# Altium PCB NewBoat.PcbDoc
Units mm, origin at the board's own origin, x right, y up, seen from the top; angles counter-clockwise.
Board outline 74.04 x 99.57 mm, 2 copper layers (Top Layer, Bottom Layer); 37 components, 56 nets, 200 pads, 1 vias.
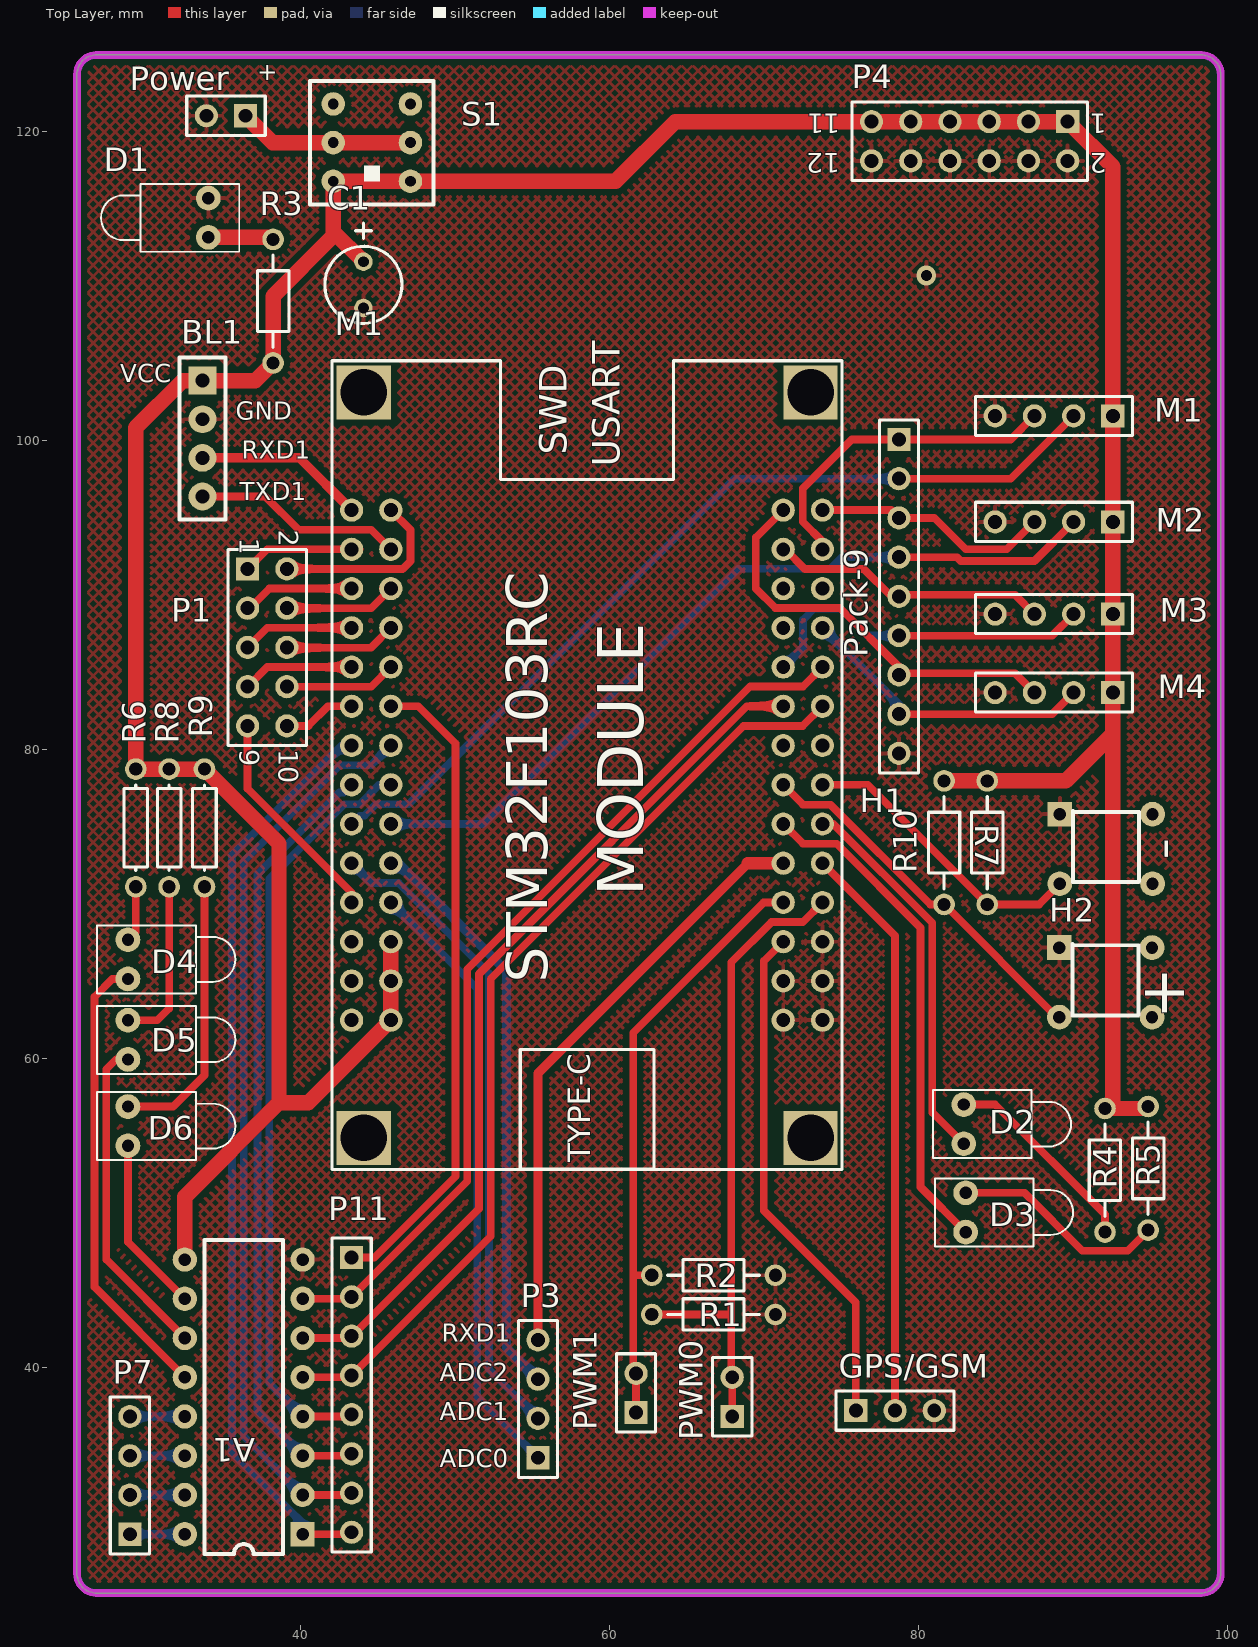
[diagram p0: Top Layer view]
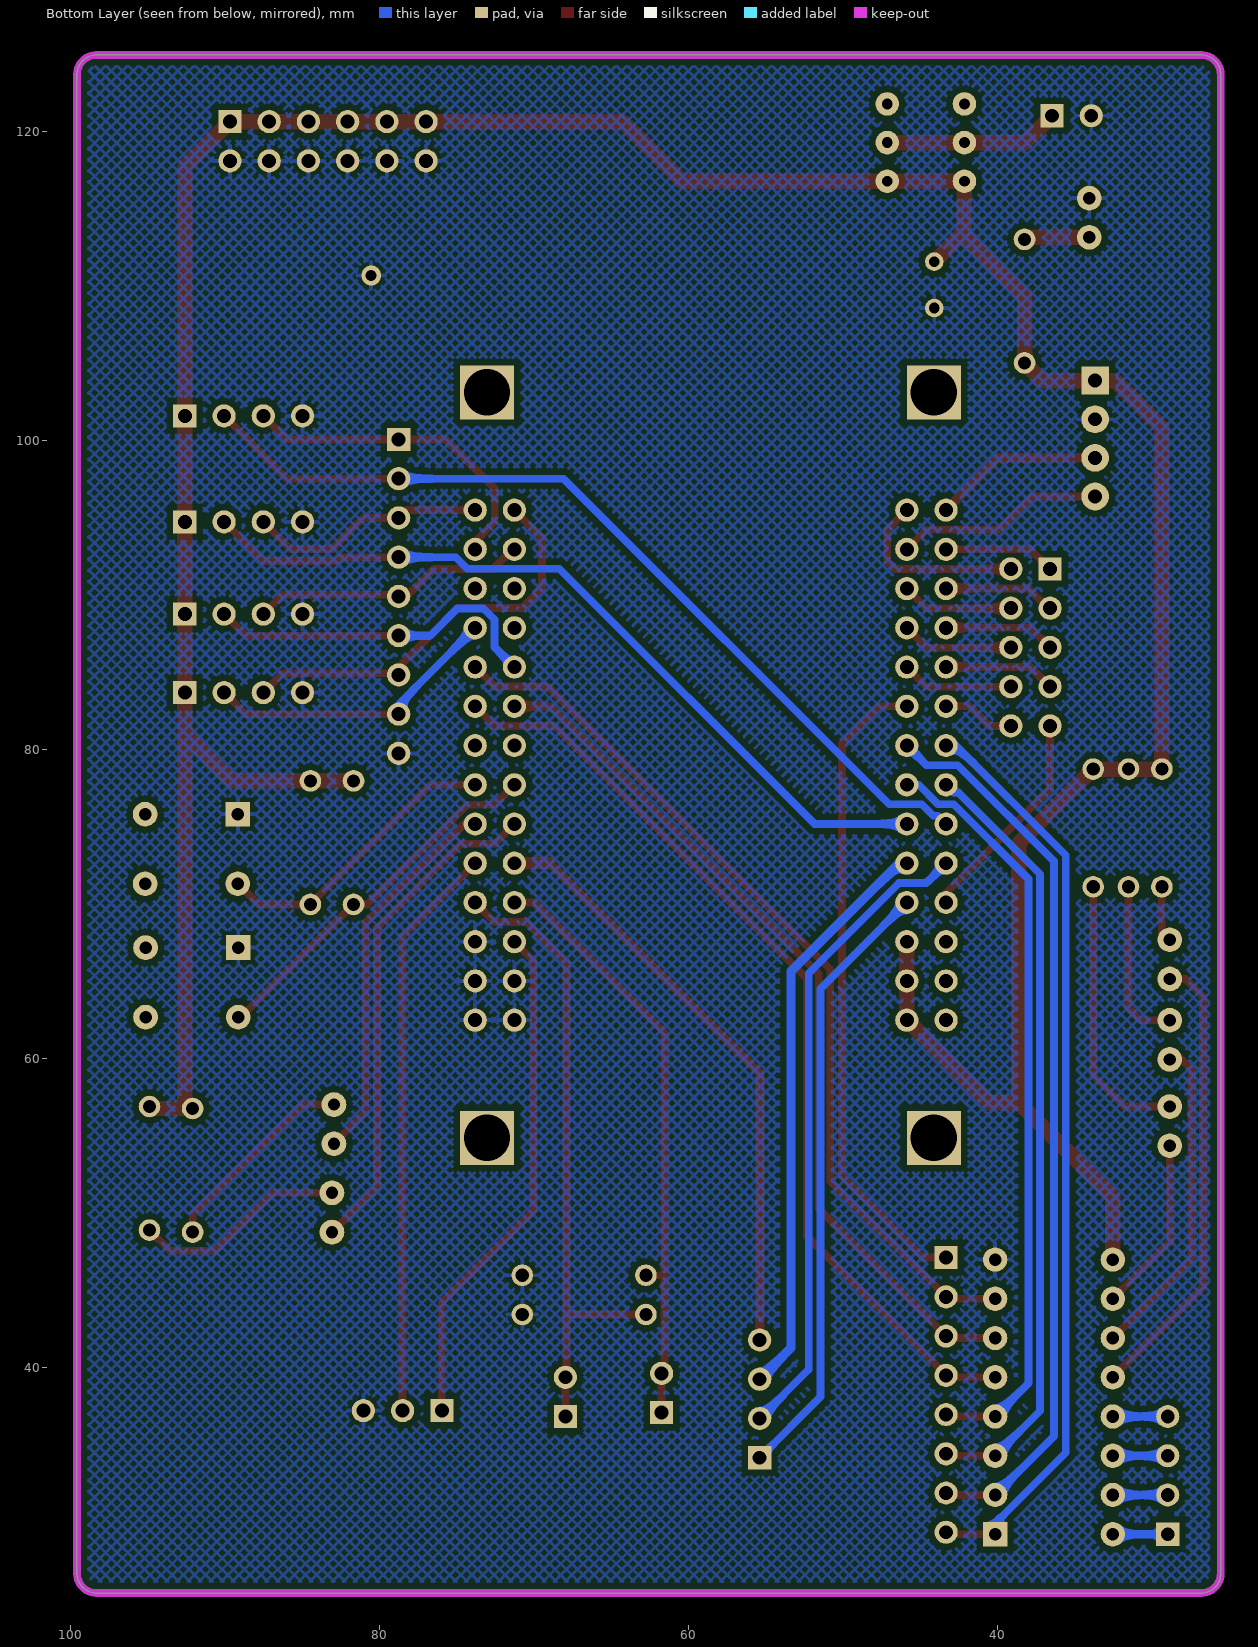
[diagram p1: Bottom Layer view, seen from below]

## Layer stack, top to bottom
Top Solder: solder mask 0.0102, Solder Resist, Dk 3.5
Top Layer: signal copper 0.0356
Dielectric 1: dielectric 0.32, FR-4, Dk 4.8
Bottom Layer: signal copper 0.0356
Bottom Solder: solder mask 0.0102, Solder Resist, Dk 3.5

## Board outline
25.527,26.67 ccw(c26.797,26.67) 26.797,25.4 98.298,25.4 ccw(c98.298,26.67) 99.568,26.67 99.568,123.698 ccw(c98.298,123.698) 98.298,124.968 26.797,124.968 ccw(c26.797,123.698) 25.527,123.698

## Design rules (kind name [scope] priority, off if disabled: settings)
Clearance PolyClearanceRule [InPolygon] p1: gap=0.4 ignorepadtopadclearanceinfootprint=FALSE except(0: Arc-Hole Track-Hole SMDPad-Hole THPad-Hole Via-Hole Fill-Hole Poly-Hole Region-Hole Text-Hole)
Clearance [All] p2: gap=0.254 ignorepadtopadclearanceinfootprint=FALSE except(0: Arc-Hole Track-Hole SMDPad-Hole THPad-Hole Via-Hole Fill-Hole Poly-Hole Region-Hole Text-Hole)
PolygonConnect [All] p1: connectstyle=Relief reliefconductorwidth=0.254 reliefentries=4 polygonreliefangle="90 Angle" airgapwidth=0.254
RoutingVias [All] p1: holewidth=0.711 width=1.27 viastyle="Through Hole" minholewidth=0.711 minwidth=1.27 maxholewidth=0.711 maxwidth=1.27
SolderMaskExpansion [All] p1: expansion=0.102
Width VCC [All] p1: maxlimit=1 minlimit=0.5 preferedwidth=0.8
Width [All] p2: maxlimit=2 minlimit=0.254 preferedwidth=0.5
30 further rules are at their usual default settings.

## Components (designator, comment, footprint, x,y, rotation, side; value= is the part's Value field where it differs from the comment)
A1 "ULN2003AN" DIP16 40.005,29.083 r180 top
BL1 "Bluetooth" "Row stitch-4" 33.655,103.886 r270 top
C1 "Cap Pol" cap-3.0 44.069,111.585 r270 top value=10uF
D1 "LED1" LED-1 34.036,114.427 r180 top
D2 "LED1" LED-1 82.931,55.753 r0 top
D3 "LED1" LED-1 83.058,50.038 r0 top
D4 "LED1" LED-1 28.829,66.421 r0 top
D5 "LED1" LED-1 28.829,61.214 r0 top
D6 "LED1" LED-1 28.829,55.626 r0 top
GPS/GSM "" HDR1X3 75.946,37.211 r0 top
H1 "Button_4" Button_4 89.154,75.819 r0 top
H2 "Button_4" Button_4 89.123,67.183 r0 top
M1 "STM32F103RC-Module" STM32F103RC 58.547,78.994 r90 top
M1 "Header 4" HDR1X4 92.583,101.6 r180 top
M2 "Header 4" HDR1X4 92.583,94.742 r180 top
M3 "Header 4" HDR1X4 92.583,88.773 r180 top
M4 "Header 4" HDR1X4 92.583,83.693 r180 top
P1 "Header 5X2" HDR2X5 36.576,91.694 r270 top
P3 "Header 4H" HDR1X4 55.372,34.163 r90 top
P4 "Header 6X2" HDR2X6 89.662,120.65 r180 top
P7 "Header 4" HDR1X4 28.956,29.21 r90 top
P11 "Header 8" HDR1X8 43.307,47.117 r270 top
Pack-9 "Header 9" HDR1X9 78.74,100.076 r270 top
Power "Header 2" HDR1X2 36.449,121.031 r180 top (schematic designator P6)
PWM0 "Header 2" HDR1X2 67.945,36.83 r90 top
PWM1 "Header 2" HDR1X2 61.722,37.084 r90 top
R1 "Res2" AXIAL-8mm 70.738,43.434 r180 top value=1K
R2 "Res2" AXIAL-8mm 70.738,45.974 r180 top value=1K
R3 "Res2" AXIAL-8mm 38.227,113.029 r270 top value=1K
R4 "Res2" AXIAL-8mm 92.075,48.768 r90 top value=1K
R5 "Res2" AXIAL-8mm 94.869,48.896 r90 top value=1K
R6 "Res1" AXIAL-0.3 29.337,74.93 r270 top value=1K
R7 "Res2" AXIAL-8mm 84.455,69.977 r90 top value=1K
R8 "Res1" AXIAL-0.3 31.496,74.93 r270 top value=1K
R9 "Res1" AXIAL-0.3 33.782,74.93 r270 top value=1K
R10 "Res2" AXIAL-8mm 81.661,69.977 r90 top value=1K
S1 "Switch-6" Switch-6 47.117,116.793 r180 top

## Footprints (in the part's own frame and the unit in brackets; to place one, negate y for a bottom-side part, rotate by r counter-clockwise, add the part's x,y. Pads: shape width x height; smd on the part's side, far side on the other; paste and mask are expansions set on the pad)
AXIAL-0.3 [mm] "Axial Device, Thru-Hole; 2 Leads; 0.3 in Pin Spacing"
  round 1.4 hole 0.85: 1(-3.81,0) 2(3.81,0)
  silkscreen extent -2.77,-0.76 2.77,0.76
AXIAL-8mm [mm] "Axial Device, Thru-Hole; 2 Leads; 0.4 in Pin Spacing"
  round 1.4 hole 0.85: 1(0,0) 2(8,0)
  silkscreen extent 1.02,-1.02 6.98,1.02
Button_4 [mm] "四角轻触小按钮"
  rect 1.6x1.6 hole 0.8: 1(0,0)
  round 1.6 hole 0.8: 2(0,-4.5) 3(6,0) 4(6,-4.5)
  silkscreen extent 0.85,-4.4 5.13,0.23
cap-3.0 [mm] "引脚距离为3mm的极性电容"
  round 1.2 hole 0.7: 1(0,0) 2(3,0)
  silkscreen extent -2.51,-2.5 4,2.5
DIP16 [mil]
  rect 62x62 hole 32: 1(-5,-5)
  round 62 hole 32: 2(-5,-105) 3(-5,-205) 4(-5,-305) 5(-5,-405) 6(-5,-505) 7(-5,-605) 8(-5,-705) 9(295,-705) 10(295,-605) 11(295,-505) 12(295,-405) 13(295,-305) 14(295,-205) 15(295,-105) 16(295,-5)
  silkscreen extent 45,-755 245,45
HDR1X2 [mm] "Connector; Header; 2 Position"
  rect 1.5x1.5 hole 0.9: 1(0,0)
  round 1.5 hole 0.9: 2(2.54,0)
  silkscreen extent -1.27,-1.27 3.81,1.27
HDR1X3 [mm] "Connector; Header; 3 Position"
  rect 1.5x1.5 hole 0.9: 1(0,0)
  round 1.5 hole 0.9: 2(2.54,0) 3(5.08,0)
  silkscreen extent -1.27,-1.27 6.35,1.27
HDR1X4 [mm] "Connector; Header; 4 Position"
  rect 1.5x1.5 hole 0.9: 1(0,0)
  round 1.5 hole 0.9: 2(2.54,0) 3(5.08,0) 4(7.62,0)
  silkscreen extent -1.27,-1.27 8.89,1.27
HDR1X8 [mm] "Connector; Header; 8 Position"
  rect 1.5x1.5 hole 0.9: 1(0,0)
  round 1.5 hole 0.9: 2(2.54,0) 3(5.08,0) 4(7.62,0) 5(10.16,0) 6(12.7,0) 7(15.24,0) 8(17.78,0)
  silkscreen extent -1.27,-1.27 19.05,1.27
HDR1X9 [mm] "Connector; Header; 9 Position"
  rect 1.5x1.5 hole 0.9: 1(0,0)
  round 1.5 hole 0.9: 2(2.54,0) 3(5.08,0) 4(7.62,0) 5(10.16,0) 6(12.7,0) 7(15.24,0) 8(17.78,0) 9(20.32,0)
  silkscreen extent -1.27,-1.27 21.59,1.27
HDR2X5 [mm] "Connector; Header; 5x2 Position"
  rect 1.5x1.5 hole 0.9: 1(0,0)
  round 1.5 hole 0.9: 2(0,2.54) 3(2.54,0) 4(2.54,2.54) 5(5.08,0) 6(5.08,2.54) 7(7.62,0) 8(7.62,2.54) 9(10.16,0) 10(10.16,2.54)
  silkscreen extent -1.27,-1.27 11.43,3.81
HDR2X6 [mm] "Connector; Header; 6x2 Position"
  rect 1.5x1.5 hole 0.9: 1(0,0)
  round 1.5 hole 0.9: 2(0,2.54) 3(2.54,0) 4(2.54,2.54) 5(5.08,0) 6(5.08,2.54) 7(7.62,0) 8(7.62,2.54) 9(10.16,0) 10(10.16,2.54) 11(12.7,0) 12(12.7,2.54)
  silkscreen extent -1.27,-1.27 13.97,3.81
LED-1 [mm] "LED; 2 Leads"
  round 1.6 hole 0.8: 1(0,1.27) 2(0,-1.27)
  silkscreen extent -2,-2.2 6.95,2.2
"Row stitch-4" [mm] "四个排针"
  rect 1.8x1.8 hole 0.9: 1(0,0)
  round 1.8 hole 0.9: 2(2.5,0) 3(5,0) 4(7.5,0)
  silkscreen extent -1.5,-1.5 9,1.5
STM32F103RC [mm]
  rect 3.5x3.5 hole 3: 0(-24.13,-14.478) 0(-24.13,14.453) 0(24.13,-14.478) 0(24.13,14.453)
  round 1.5 hole 0.9: 1(16.51,15.24) 2(16.51,12.7) 3(13.97,15.24) 4(13.97,12.7) 5(11.43,15.24) 6(11.43,12.7) 7(8.89,15.24) 8(8.89,12.7) 9(6.35,15.24) 10(6.35,12.7) 11(3.81,15.24) 12(3.81,12.7) 13(1.27,15.24) 14(1.27,12.7) 15(-1.27,15.24) 16(-1.27,12.7) 17(-3.81,15.24) 18(-3.81,12.7) 19(-6.35,15.24) 20(-6.35,12.7) 21(-8.89,15.24) 22(-8.89,12.7) 23(-11.43,15.24) 24(-11.43,12.7) 25(-13.97,15.24) 26(-13.97,12.7) 27(-16.51,15.24) 28(-16.51,12.7) 29(16.51,-12.7) 30(16.51,-15.24) 31(13.97,-12.7) 32(13.97,-15.24) 33(11.43,-12.7) 34(11.43,-15.24) 35(8.89,-12.7) 36(8.89,-15.24) 37(6.35,-12.7) 38(6.35,-15.24) 39(3.81,-12.7) 40(3.81,-15.24) 41(1.27,-12.7) 42(1.27,-15.24) 43(-1.27,-12.7) 44(-1.27,-15.24) 45(-3.81,-12.7) 46(-3.81,-15.24) 47(-6.35,-12.7) 48(-6.35,-15.24) 49(-8.89,-12.7) 50(-8.89,-15.24) 51(-11.43,-12.7) 52(-11.43,-15.24) 53(-13.97,-12.7) 54(-13.97,-15.24) 55(-16.51,-12.7) 56(-16.51,-15.24)
  silkscreen extent -26.17,-16.51 26.18,16.51
Switch-6 [mm] "六角按键开关"
  round 1.524 hole 0.7: 1(0,0) 2(0,-2.5) 3(0,-5) 4(5,0) 5(5,-2.5) 6(5,-5)
  silkscreen extent -1.5,-6.5 6.5,1.5

## Part data
C1: "Polarized Capacitor (Axial)", LatestRevisionDate=17-Jul-2002, LatestRevisionNote="Re-released for DXP Platform.", PackageDescription="Polarized Capacitor; 2 Leads", PackageReference=POLAR0.8, Published=8-Jun-2000, Publisher="Altium Limited"
D1 D2 D3 D4 D5 D6: "Typical RED GaAs LED", LatestRevisionDate=08-Jul-2005, LatestRevisionNote="Mech Layer 1 removed.", PackageDescription="LED; 2 Leads", PackageReference=LED-1, Published=8-Jun-2000, Publisher="Altium Limited"
GPS/GSM: library part "Header 3", "Header, 3-Pin", LatestRevisionDate=17-Jul-2002, LatestRevisionNote="Re-released for DXP Platform.", Publisher="Altium Limited"
M1 M2 M3 M4 P7: "Header, 4-Pin", LatestRevisionDate=17-Jul-2002, LatestRevisionNote="Re-released for DXP Platform.", Publisher="Altium Limited"
P1: "Header, 5-Pin, Dual row", LatestRevisionDate=17-Jul-2002, LatestRevisionNote="Re-released for DXP Platform.", Publisher="Altium Limited"
P3: "Header, 4-Pin, Right Angle", LatestRevisionDate=17-Jul-2002, LatestRevisionNote="Re-released for DXP Platform.", Publisher="Altium Limited"
P4: "Header, 6-Pin, Dual row", LatestRevisionDate=17-Jul-2002, LatestRevisionNote="Re-released for DXP Platform.", Publisher="Altium Limited"
P11: "Header, 8-Pin", LatestRevisionDate=17-Jul-2002, LatestRevisionNote="Re-released for DXP Platform.", Publisher="Altium Limited"
Pack-9: "Header, 9-Pin", LatestRevisionDate=17-Jul-2002, LatestRevisionNote="Re-released for DXP Platform.", Publisher="Altium Limited"
Power PWM0 PWM1: "Header, 2-Pin", LatestRevisionDate=17-Jul-2002, LatestRevisionNote="Re-released for DXP Platform.", Publisher="Altium Limited"
R1 R2 R3 R4 R5 R6 R7 R8 R9 R10: "Resistor", LatestRevisionDate=17-Jul-2002, LatestRevisionNote="Re-released for DXP Platform.", Published=8-Jun-2000, Publisher="Altium Limited"
  R1 R2 R3 R4 R5 R7 R10: PackageDescription="Axial Device, Thru-Hole; 2 Leads; 0.4 in Pin Spacing", PackageReference=AXIAL-0.4
  R6 R8 R9: PackageDescription="Axial Device, Thru-Hole; 2 Leads; 0.3 in Pin Spacing", PackageReference=AXIAL-0.3

## Via types
v1: diameter 1.27, hole 0.711, Top Layer to Bottom Layer, 1 vias

## Nets (pads, with @x,y where several pads share a name; then routed paths per layer and width w, separated by ;. In a path a pad name is that pad's centre, name@x,y a point inside that pad or via, vN(x,y) a via of type N, cw(c..) or ccw(c..) an arc to the next point about the centre after c; other vN are vias at no path point)
+5: A1.9 BL1.1 C1.1 M1.1@92.583,101.6 M1.24 M1.26 M1.28 M2.1 M3.1 M4.1 P4.1 P4.3 P4.5 P4.7 P4.9 P4.11 R3.2 R4.2 R5.2 R6.1 R7.2 R8.1 R9.1 R10.2 S1.1 S1.4 | length 233.6
  Top Layer w1: A1.9 32.512,51.054 38.608,57.15 ; C1.1 42.117,113.537 ; M1.24 M1.26 M1.28 40.513,57.15 38.608,57.15 ; R10.2 R7.2 89.534,77.977 92.583,81.026 ; R5.2 94.741,56.768 R4.2 92.583,57.276 92.583,81.026 ; 38.608,57.15 38.608,73.914 R9.1 R8.1 R6.1 29.337,100.838 32.385,103.886 BL1.1 37.084,103.886 R3.2 38.227,109.347 42.117,113.237 42.117,113.537 ; 42.117,113.537 S1.4 S1.1 60.405,116.793 64.262,120.65 P4.11 P4.9 P4.7 P4.5 P4.3 P4.1 92.583,117.729 92.583,101.6 M2.1 M3.1 M4.1 92.583,81.026
ADC0: M1.22 P3.1 | length 39.9
  Bottom Layer w0.5: M1.22 51.435,64.516 51.435,38.1 P3.1
ADC1: M1.19 P3.2 | length 42
  Bottom Layer w0.5: M1.19 44.593,71.358 46.366,71.358 52.197,65.527 52.197,39.878 P3.2
ADC2: M1.20 P3.3 | length 37.6
  Bottom Layer w0.6: M1.20 46.355,72.644 53.34,65.659 53.34,41.275 P3.3
ADC3: M1.47 P3.4 | length 38.9
  Top Layer w0.6: P3.4@55.626,41.783 55.372,42.037 55.372,59.055 68.961,72.644
  Top Layer w0.8: 68.961,72.644 M1.47
B1: A1.1 M1.13 P11.8 | length 59.7
  Top Layer w0.5: A1.1 43.18,29.21 P11.8
  Bottom Layer w0.5: A1.1 40.132,29.924 35.568,34.488 35.568,73.16 42.672,80.264 M1.13
B2: A1.2 M1.14 P11.7 | length 58.5
  Top Layer w0.5: A1.2 43.18,31.75 P11.7
  Bottom Layer w0.5: A1.2 36.322,35.56 36.322,72.771 42.545,78.994 44.577,78.994 M1.14
B3: A1.3 M1.15 P11.6 | length 50.6
  Top Layer w0.5: A1.3 43.18,34.29 P11.6
  Bottom Layer w0.5: A1.3 37.219,37.203 37.219,71.936 42.507,77.224 42.807,77.224 M1.15
B4: A1.4 M1.16 P11.5 | length 49.3
  Top Layer w0.5: A1.4 43.18,36.83 P11.5
  Bottom Layer w0.5: A1.4 37.973,38.989 37.973,71.623 42.82,76.47 43.826,76.47 45.08,77.724 M1.16
B5: A1.5 M1.40 P11.4 | length 61.4
  Top Layer w0.5: A1.5 43.18,39.37 P11.4 52.308,48.498 52.308,65.161 68.681,81.534 72.517,81.534 M1.40
B6: A1.6 M1.39 P11.3 | length 57
  Top Layer w0.5: A1.6 43.18,41.91 P11.3 51.554,50.284 51.554,65.474 68.884,82.804 M1.39
B7: A1.7 M1.38 P11.2 | length 58.6
  Top Layer w0.5: A1.7 43.18,44.45 P11.2 50.8,52.07 50.8,65.786 69.104,84.09 72.533,84.09 M1.38
B8: M1.12 P11.1 | length 42.1
  Top Layer w0.5: P11.1 44.781,47.117 50.038,52.374 50.038,80.391 47.625,82.804 M1.12
E1: M1.3@87.503,101.6 M1.32 Pack-9.1 | length 21.4
  Top Layer w0.5: M1.32 73.787,93.472 72.517,94.742 72.517,96.901 75.692,100.076 Pack-9.1 85.979,100.076 M1.3@87.503,101.6
E2: M1.30 M2.3 Pack-9.3 | length 15.5
  Top Layer w0.5: M1.30 78.232,95.504 Pack-9.3 81.026,94.996 83.058,92.964 85.725,92.964 M2.3
E3: M1.31 M3.3 Pack-9.5 | length 18.1
  Top Layer w0.5: M1.31 71.374,92.964 72.644,91.694 76.454,91.694 78.232,89.916 Pack-9.5 78.74,90.027 86.249,90.027 M3.3
E4: M1.29 M4.3 Pack-9.7 | length 27
  Top Layer w0.5: M1.29 69.469,93.726 69.469,90.429 70.728,89.17 74.914,89.17 78.74,85.344 Pack-9.7@78.74,84.947 ; Pack-9.7 Pack-9.7@78.74,84.947 ; M4.3 86.249,84.947 Pack-9.7@78.74,84.947
GND: A1.8 BL1.2 C1.2 D1.2 GPS/GSM.3 H1.1 H2.1 M1.4@84.963,101.6 M1.52 M1.53 M1.54 M1.55 M1.56 M2.4 M3.4 M4.4 P4.2 P4.4 P4.6 P4.8 P4.10 P4.12 Pack-9.9 Power.2 R1.1 R2.1
  other v1: 80.518,110.692
INT1: H1.2 M1.44 R7.1 | length 19.1
  Top Layer w0.5: M1.44 76.708,77.724 R7.1 87.812,69.977 H1.2
INT2: H2.2 M1.43 R10.1 | length 24.1
  Top Layer w0.5: M1.43 72.533,76.438 74.306,76.438 80.767,69.977 R10.1 88.955,62.683 H2.2
L1: A1.12 D4.2 | length 29.7
  Top Layer w0.5: D4.2 27.813,65.151 26.67,64.008 26.67,45.212 A1.12
L2: A1.11 D5.2 | length 21.2
  Top Layer w0.5: D5.2 28.067,59.944 27.424,59.301 27.424,46.998 A1.11
L3: A1.10 D6.2 | length 11.4
  Top Layer w0.5: D6.2 28.829,48.133 A1.10
LED_T1: D2.2 M1.46 | length 24.9
  Top Layer w0.5: M1.46 74.494,75.184 80.899,68.779 80.899,56.515 D2.2
LED_T2: D3.2 M1.45 | length 32.6
  Top Layer w0.5: M1.45 72.533,73.898 74.714,73.898 80.137,68.475 80.137,51.689 D3.2
NetA1_13: A1.13 P7.4 | length 3.6
  Bottom Layer w0.5: P7.4 A1.13
NetA1_14: A1.14 P7.3 | length 3.6
  Bottom Layer w0.5: P7.3 A1.14
NetA1_15: A1.15 P7.2 | length 3.6
  Bottom Layer w0.5: P7.2 A1.15
NetA1_16: A1.16 P7.1 | length 3.6
  Bottom Layer w0.5: P7.1 A1.16
NetD1_1: D1.1 R3.1 | length 4.2
  Top Layer w1: D1.1 38.099,113.157 R3.1
NetD2_1: D2.1 R4.1 | length 13.2
  Top Layer w0.5: D2.1 84.963,57.023 92.075,49.911 R4.1
NetD3_1: D3.1 R5.1 | length 13.9
  Top Layer w0.5: D3.1 86.868,51.308 90.612,47.564 93.537,47.564 R5.1
NetD4_1: D4.1 R6.2 | length 3.6
  Top Layer w0.5: D4.1 29.337,68.199 R6.2
NetD5_1: D5.1 R8.2 | length 10.9
  Top Layer w0.5: D5.1 30.734,62.484 31.496,63.246 R8.2
NetD6_1: D6.1 R9.2 | length 18
  Top Layer w0.5: D6.1 31.75,56.896 33.782,58.928 R9.2
PWM0: M1.50 PWM0.1 PWM0.2 R1.2 | length 42.2
  Top Layer w0.5: R1.2 67.756,43.434 67.883,43.561 ; PWM0.1 PWM0.2 67.883,39.37 67.883,43.561 ; M1.50 72.517,68.834 70.485,68.834 67.883,66.232 67.883,43.561
PWM1: M1.49 PWM1.1 PWM1.2 R2.2 | length 39.2
  Top Layer w0.5: PWM1.1 PWM1.2 61.534,39.624 61.534,46.101 ; R2.2 61.661,45.974 61.534,46.101 ; M1.49 69.977,70.104 61.534,61.661 61.534,46.101
RXD1: BL1.3 M1.1@43.307,95.504 | length 11.1
  Top Layer w0.6: BL1.3 39.925,98.886 M1.1@43.307,95.504
RXD2: GPS/GSM.2 M1.48 | length 37.4
  Top Layer w0.5: M1.48 78.486,67.945 GPS/GSM.2
T1: M1.2@90.043,101.6 M1.17 Pack-9.2 | length 57.7
  Top Layer w0.5: Pack-9.2 85.979,97.536 M1.2@90.043,101.6
  Bottom Layer w0.5: M1.17 43.839,75.716 44.139,75.716 44.877,76.454 46.99,76.454 68.072,97.536 Pack-9.2
T2: M1.18 M2.2 Pack-9.4 | length 52.5
  Top Layer w0.5: Pack-9.4 82.5,92.456 82.746,92.21 87.511,92.21 M2.2
  Bottom Layer w0.5: M1.18 51.816,75.184 68.342,91.71 74.306,91.71 75.052,92.456 Pack-9.4
T3: M1.37 M3.2 Pack-9.6 | length 22.7
  Top Layer w0.5: Pack-9.6 88.646,87.376 M3.2
  Bottom Layer w0.5: M1.37 72.533,86.63 72.533,88.403 73.268,89.138 74.914,89.138 74.93,89.154 76.708,87.376 Pack-9.6
T4: M1.36 M4.2 Pack-9.8 | length 19.5
  Top Layer w0.5: Pack-9.8 88.646,82.296 M4.2
  Bottom Layer w0.5: M1.36 78.74,82.931 Pack-9.8
TXD1: BL1.4 M1.4@45.847,92.964 | length 13.6
  Top Layer w0.5: BL1.4 37.726,96.386 39.878,94.234 44.577,94.234 M1.4@45.847,92.964
TXD2: GPS/GSM.1 M1.51 | length 33.3
  Top Layer w0.5: M1.51 69.993,66.31 69.993,50.165 75.946,44.212 GPS/GSM.1
VBAT: Power.1 S1.2 S1.5 | length 11.4
  Top Layer w1: Power.1 38.187,119.293 S1.5 S1.2
X1: M1.2@45.847,95.504 P1.2 | length 12.4
  Top Layer w0.5: P1.2@39.116,91.44 P1.2@39.37,91.694 ; P1.2 P1.2@39.37,91.694 ; M1.2@45.847,95.504 47.117,94.234 47.117,92.202 46.609,91.694 P1.2@39.37,91.694
X2: M1.3@43.307,92.964 P1.1 | length 7.8
  Top Layer w0.5: P1.1 37.846,92.964 43.307,92.964 M1.3@43.815,92.964
X3: M1.5 P1.3 | length 7.6
  Top Layer w0.5: P1.3 36.703,89.154 37.973,90.424 M1.5 M1.5@43.053,90.17
X4: M1.6 P1.4 | length 7.8
  Top Layer w0.5: P1.4 44.577,89.154 M1.6 M1.6@45.339,90.424
X5: M1.7 P1.5 | length 7.3
  Top Layer w0.5: P1.5 37.846,87.884 M1.7
X6: M1.8 P1.6 | length 7.3
  Top Layer w0.5: P1.6 39.132,86.598 44.561,86.598 M1.8
X7: M1.9 P1.7 | length 7.3
  Top Layer w0.5: P1.7 37.846,85.344 M1.9
X8: M1.10 P1.8 | length 7.3
  Top Layer w0.5: P1.8 44.577,84.074 M1.10
X9: M1.21 P1.9 | length 14.2
  Top Layer w0.5: P1.9 36.576,77.47 43.307,70.739 M1.21
X10: M1.11 P1.10 | length 4.7
  Top Layer w0.5: P1.10 40.513,81.534 41.783,82.804 M1.11
pads on no net: H1.3 H1.4 H2.3 H2.4 M1.0 M1.23 M1.25 M1.27 M1.33 M1.34 M1.35 M1.41 M1.42 S1.3 S1.6

## Polygon pours and split planes (outlines as drawn)
GND on Top Layer (hatched 45Degree grid 0.508 track 0.203, pour order 22): 25.781,124.587 25.527,124.333 25.527,26.162 26.162,25.527 99.06,25.527 99.06,25.781 99.441,26.162 99.441,124.333 98.679,125.095 98.552,124.968 26.035,124.968
GND on Bottom Layer (hatched 45Degree grid 0.508 track 0.203, pour order 24): 26.035,124.968 26.035,124.841 25.527,124.333 25.527,26.162 26.162,25.527 99.06,25.527 99.06,26.162 99.568,26.67 99.441,26.797 99.441,124.333 98.933,124.333 98.298,124.968

## Keep-outs
Keep-Out Layer:
  the board outline again, w0.5

## Silkscreen, mask and mechanical layers (free items; w line width, h text height)
Top Overlay:
  text "+" at 37.211,122.936 h2
  text "VCC" at 28.321,103.378 h2
  text "GND" at 35.814,100.965 h2
  text "RXD1" at 36.195,98.425 h2
  text "TXD1" at 36.068,95.758 h2
  text "-" at 98.044,74.295 h5 r90
  text "+" at 98.171,65.913 h5 r90
  text "RXD1" at 49.149,41.275 h2
  text "ADC2" at 49.022,38.735 h2
  text "ADC1" at 49.022,36.195 h2
  text "ADC0" at 49.022,33.147 h2

## Text inside footprints (layer, text, board x,y; h text height)
M1: Top Overlay "TYPE-C" at 59.247,53.294 h2.5 r90; Top Overlay "SWD" at 57.825,99.082 h3.05 r90; Top Overlay "USART" at 61.254,98.32 h3.05 r90; Top Overlay "STM32F103RC" at 56.847,64.894 h4.57 r90; Top Overlay "MODULE" at 63.147,70.494 h5.08 r90
P1: Top Overlay "10" at 38.608,80.01 h1.27 r270; Top Overlay "9" at 36.068,80.01 h1.27 r270; Top Overlay "1" at 36.068,93.726 h1.27 r270; Top Overlay "2" at 38.608,94.234 h1.27 r270
P4: Top Overlay "12" at 74.93,118.618 h1.27 r180; Top Overlay "1" at 73.914,121.158 h1.27 r180; Top Overlay "1" at 74.93,121.158 h1.27 r180; Top Overlay "1" at 92.202,121.158 h1.27 r180; Top Overlay "2" at 92.202,118.618 h1.27 r180